# EAGLE board demeler_pcb (EAGLE 6.1)

Size 246 x 152 mm. Coordinates in mm from the lower left corner, seen from the top.
Outline: 78,100 78,120 70,120 70,0 0,0 0,152
Outline: 246,100 246,152
Copper layers (1*16): Top 0.035mm / dielectric 1.5mm / Bottom 0.035mm
Design rules: minimum track width 30mil, minimum drill 24mil, track to track 8mil, track to pad 8mil, pad to pad 8mil, via to via 8mil, smd to smd 8mil, copper to edge 40mil, drill to drill 8mil, minimum pad ring 10mil, minimum via ring 8mil, stop-mask expansion 4mil, vias tented up to drill 0mil, thermal gap 10mil

## Footprints (pad centres in the part's own frame; a part is rotated, then mirrored left to right if it is on the bottom)
C2.5-2 = drill 0.813 pad 1.6 octagon: 1 -1.27,0; 2 1.27,0
JP4 = drill 0.914 long: 1 -3.81,0; 2 -1.27,0; 3 1.27,0; 4 3.81,0
JP1 = drill 0.914 long: 1 0,-1.27; 2 0,1.27
DIL28-3 = drill 0.813 long: 1 -16.51,-3.81; 2 -13.97,-3.81; 3 -11.43,-3.81; 4 -8.89,-3.81; 5 -6.35,-3.81; 6 -3.81,-3.81; 7 -1.27,-3.81; 8 1.27,-3.81; 9 3.81,-3.81; 10 6.35,-3.81; 11 8.89,-3.81; 12 11.43,-3.81; 13 13.97,-3.81; 14 16.51,-3.81; 15 16.51,3.81; 16 13.97,3.81; 17 11.43,3.81; 18 8.89,3.81; 19 6.35,3.81; 20 3.81,3.81; 21 1.27,3.81; 22 -1.27,3.81; 23 -3.81,3.81; 24 -6.35,3.81; 25 -8.89,3.81; 26 -11.43,3.81; 27 -13.97,3.81; 28 -16.51,3.81
DIL16 = drill 0.813 long: 1 -8.89,-3.81; 2 -6.35,-3.81; 3 -3.81,-3.81; 4 -1.27,-3.81; 5 1.27,-3.81; 6 3.81,-3.81; 7 6.35,-3.81; 8 8.89,-3.81; 9 8.89,3.81; 10 6.35,3.81; 11 3.81,3.81; 12 1.27,3.81; 13 -1.27,3.81; 14 -3.81,3.81; 15 -6.35,3.81; 16 -8.89,3.81
SPC4077 = drill 0.8 pad 2.184 long: 1 -3,0; 2 0,-4.8 | drill 1 pad 2.184 long: 3 3,0
1445055-5 = drill 1 pad 1.676: 1 6,4.32; 2 3,4.32; 3 0,4.32; 4 -3,4.32; 5 -6,4.32 | hole 3: -3.85,0; 3.85,0
JP2 = drill 0.914 long: 1 -5.08,0; 2 0,0; 3 5.08,0
LED3MM = drill 0.813 octagon: A -1.27,0; K 1.27,0
HC49/S = drill 0.813: 1 -2.413,0; 2 2.413,0
0204/7 = drill 0.813 octagon: 1 -3.81,0; 2 3.81,0
0207/10 = drill 0.813 octagon: 1 -5.08,0; 2 5.08,0
DP-02 = drill 0.813 long: 1 -2.54,-2.54; 2 2.54,-2.54; 3 2.54,3.81; 4 -2.54,3.81
EDG-02 = drill 0.813 long: 1 -1.27,-3.81; 2 2.54,-3.81; 3 2.54,2.54; 4 -1.27,2.54
RJ45-NO-SHIELD = drill 0.9 pad 1.4: 1 -4.445,6.35; 2 -3.175,8.89; 3 -1.905,6.35; 4 -0.635,8.89; 5 0.635,6.35; 6 1.905,8.89; 7 3.175,6.35; 8 4.445,8.89 | hole 3.251: -5.715,0; 5.715,0
KUSBVX = drill 0.9 pad 1.3: 1 3.5,0; 2 1,0; 3 -1,0; 4 -3.5,0 | drill 2.3 pad 2.8: M1 -6.57,2.71; M2 6.57,2.71

## Placement (x,y rotation side)
C1  22pf  [C2.5-2]  124.23,116.53 180 top
C2  22pf  [C2.5-2]  146.69,115.47 0 top
CONN  [JP4]  66,92 90 top
CONNE  [JP4]  66,116 90 top
CONNECTOR  [JP4]  66,104 90 top
CONNECTOR1  [JP1]  66,82 0 top
IC1  ATMEGA328  [DIL28-3]  128.66,127.37 0 top
IC2  L293D  [DIL16]  235.87,128.07 0 top
J1  [SPC4077]  239.65,111.01 90 top
J2  1445055-5  [1445055-5]  148.6,105.4 0 top
JP1  [JP4]  174.15,135.58 90 top
JP3  [JP4]  215.85,127.85 270 top
JP4  [JP4]  218.53,130.95 90 top
JP5  [JP1]  27.61,107.47 0 top
JP7  [JP2]  90.42,149.77 180 top
JP8  [JP2]  58.39,149.77 180 top
JP9  [JP1]  149.09,147.24 270 top
JP10  [JP2]  74.32,148.15 180 top
JP11  [JP1]  6.91,126.41 90 top
JP12  [JP1]  7.09,105.94 270 top
LED2  [LED3MM]  126.77,144.18 180 top
Q1  16MHZ  [HC49/S]  135.12,115.2 180 top
R1  [0204/7]  158.39,143.45 180 top
R2  330R  [0207/10]  139.9,142.55 0 top
R4  10K  [0207/10]  94.8,125.45 180 top
RFIDCONNECTOR  [JP4]  16.23,137.72 270 top
S1  [DP-02]  114.8,144.42 270 top
SERIALTOUSBOTHER  [JP4]  151.77,126.06 90 top
SW1  [EDG-02]  227.9,104.35 0 top
TX  [JP4]  167.52,149.47 0 top
TX1  [JP4]  212.09,149.47 0 top
TX2  [JP4]  7.47,115.34 270 top
USB2LANOP  [JP4]  183.85,128.99 270 top
USB2SERIAL  [JP4]  174.15,125.71 90 top
X1  RJ45-6X  [RJ45-NO-SHIELD]  210.41,106.89 0 top
X2  KUSBVX  [KUSBVX]  181.72,107.2 180 top

## Library data of the parts
C1 C2 = capacitor-wima
CONN CONNE CONNECTOR CONNECTOR1 JP1 JP3-JP5 JP7-JP12 RFIDCONNECTOR SERIALTOUSBOTHER TX TX1 TX2 USB2LANOP USB2SERIAL = jumper
IC1 = quantum-research-group; OC_FARNELL: unknown; OC_NEWARK: unknown
IC2 = st-microelectronics; MPN: L293D; OC_FARNELL: 9589619; OC_NEWARK: 56P8249
J1 = con-jack; OC_FARNELL: unknown; OC_NEWARK: unknown
J2 = con-amp
LED2 = led
Q1 = crystal; OC_FARNELL: 1667008; OC_NEWARK: unknown
R1 R2 R4 = rcl
S1 = switch-dil; MPN: MCDP02; OC_FARNELL: 1255233; OC_NEWARK: 26M1095
SW1 = special
X1 = con-tycoelectronics; MPN: RJ45-6X; OC_FARNELL: unknown; OC_NEWARK: 01P1604
X2 = con-kycon

## Nets
+5V: IC1.7 IC1.20 J2.1 JP1.1 JP7.1 JP8.1 JP10.1 R4.2 RFIDCONNECTOR.3 SERIALTOUSBOTHER.4 X2.4
GND: C1.1 C2.1 IC1.8 IC1.18 IC1.22 J1.1 J2.5 JP7.2 JP8.2 JP9.2 JP10.2 LED2.K RFIDCONNECTOR.4 S1.4 SERIALTOUSBOTHER.1 SW1.1 TX.4 USB2SERIAL.3 X2.1
GND1: IC2.4
GND2: IC2.5
GND3: IC2.13
GND4: IC2.12
N$1: C1.2 IC1.9 Q1.2
N$2: C2.2 IC1.10 Q1.1
N$3: J1.3
N$4: IC1.3 J2.3 USB2SERIAL.1 X2.3
N$5: IC1.19 R2.2
N$6: IC2.9 X1.1
N$7: IC2.11 X1.2
N$8: IC2.14 X1.3
N$9: IC2.16 X1.6
N$10: IC2.8 JP3.1
N$11: IC2.6 JP4.4
N$12: IC2.3 JP3.2
N$13: IC2.1 JP4.2
N$14: IC2.10 TX1.4
N$15: IC2.15 TX1.3
N$17: R1.2 TX.2
N$18: JP9.1 R1.1 TX.3
N$20: IC1.2 J2.2 USB2SERIAL.2 X2.2
N$23: JP5.2 SW1.2
N$24: IC1.27 RFIDCONNECTOR.2
N$25: IC1.28 RFIDCONNECTOR.1
N$26: JP7.3 JP8.3 JP10.3
N$27: JP11.2 TX2.1
N$28: JP11.1 TX2.2
N$29: JP12.2 TX2.3
N$30: JP12.1 TX2.4
N$31: IC1.1 R4.1 S1.2
N$32: LED2.A R2.1

## Tracks (layer width: path | path; a pad name or v marks a point on that pad's centre or on a via)
+5V  (10 unrouted)
GND  (18 unrouted)
N$1  (2 unrouted)
N$2  (2 unrouted)
N$4  (3 unrouted)
N$5  (1 unrouted)
N$6  (1 unrouted)
N$7  (1 unrouted)
N$8  (1 unrouted)
N$9  (1 unrouted)
N$10  (1 unrouted)
N$11  (1 unrouted)
N$12  (1 unrouted)
N$13  (1 unrouted)
N$14  (1 unrouted)
N$15  (1 unrouted)
N$17  (1 unrouted)
N$18  (2 unrouted)
N$20  (3 unrouted)
N$23  (1 unrouted)
N$24  (1 unrouted)
N$25  (1 unrouted)
N$26  (2 unrouted)
N$27  (1 unrouted)
N$28  (1 unrouted)
N$29  (1 unrouted)
N$30  (1 unrouted)
N$31  (2 unrouted)
N$32  (1 unrouted)
(copper drawn outside any net)
  shapes: Bottom area x8